# EAGLE board HDMI_RGB_LVDS (EAGLE 6.3)
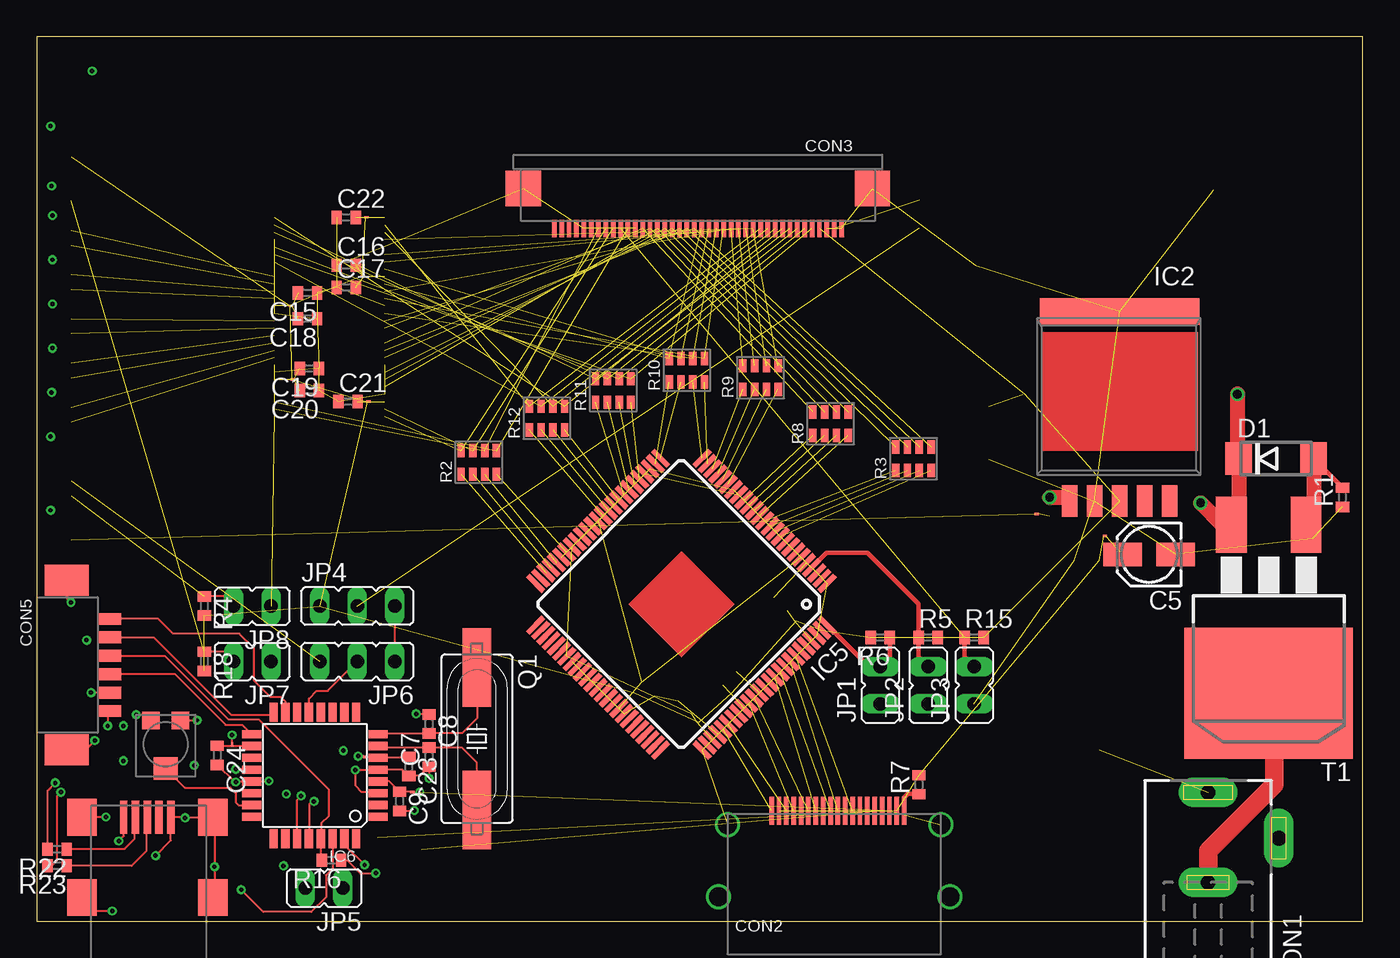
[diagram p0: board, top side]
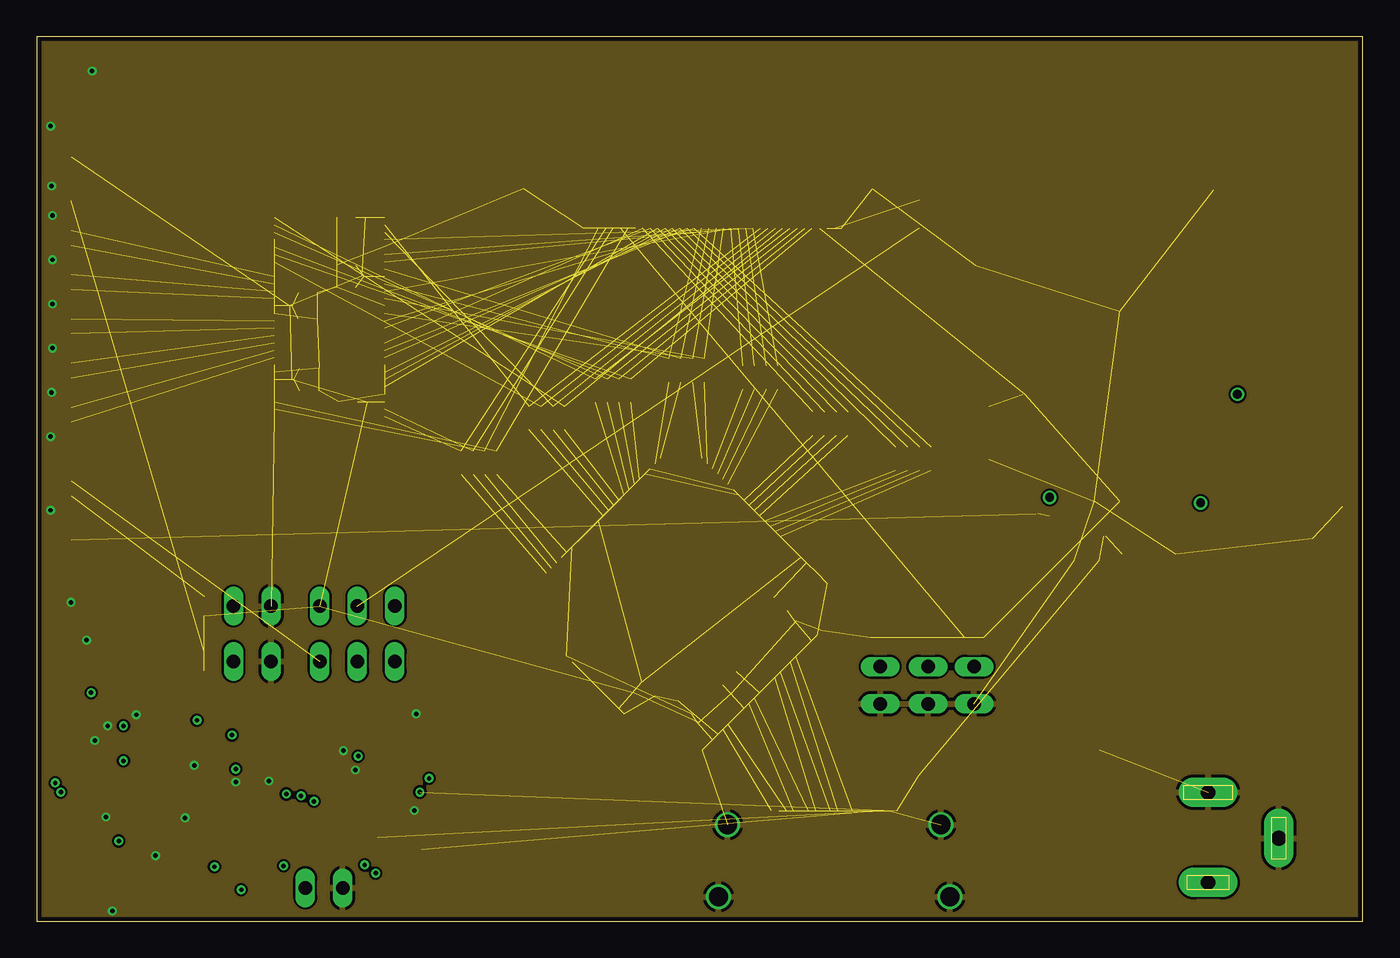
[diagram p1: board, inner layer Route2]
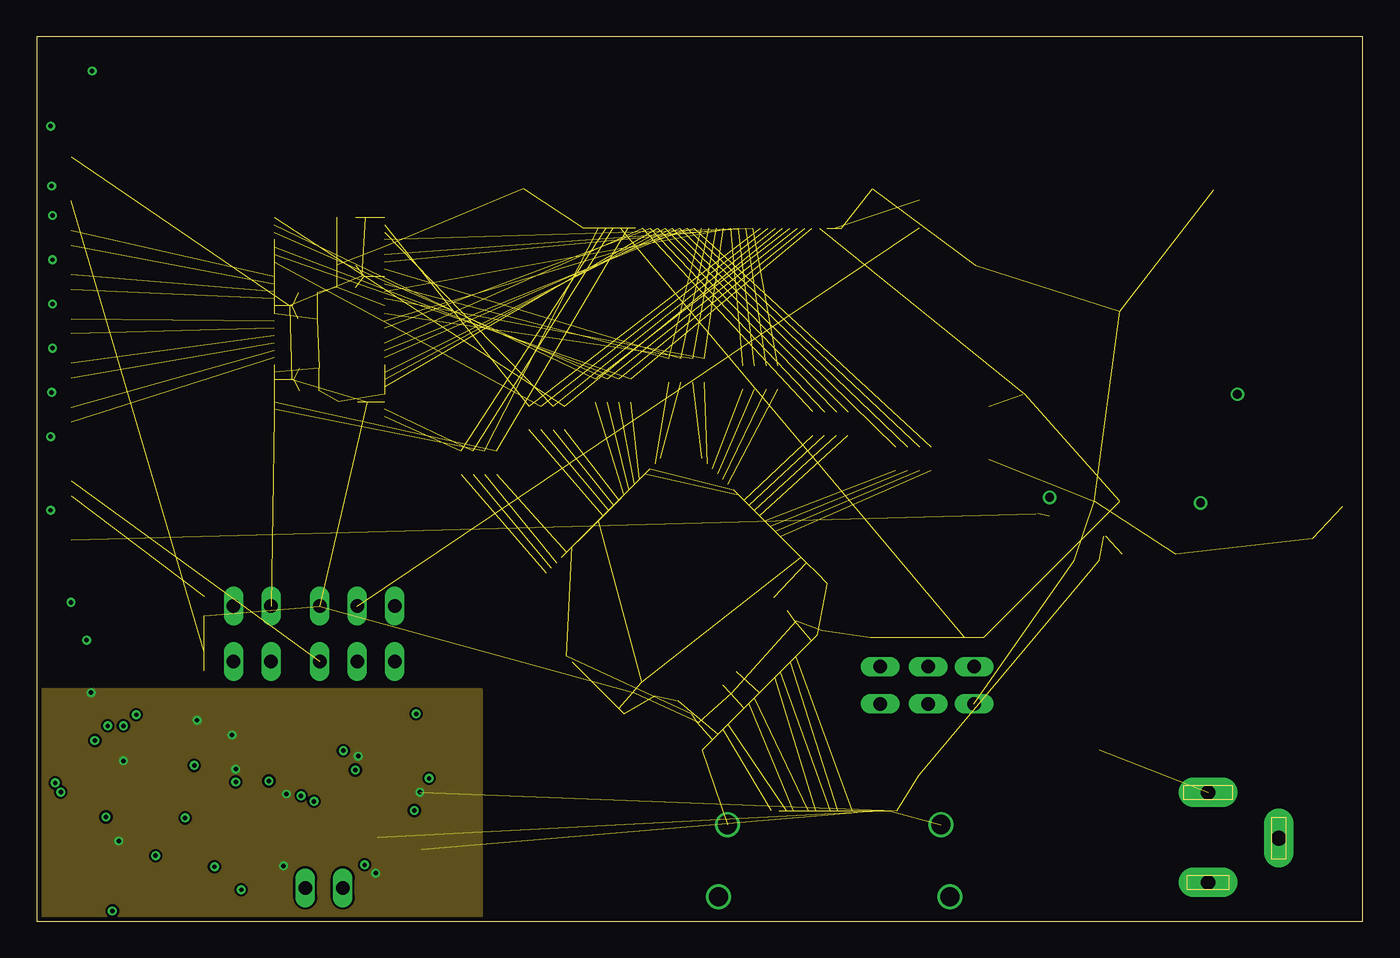
[diagram p2: board, inner layer Route15]
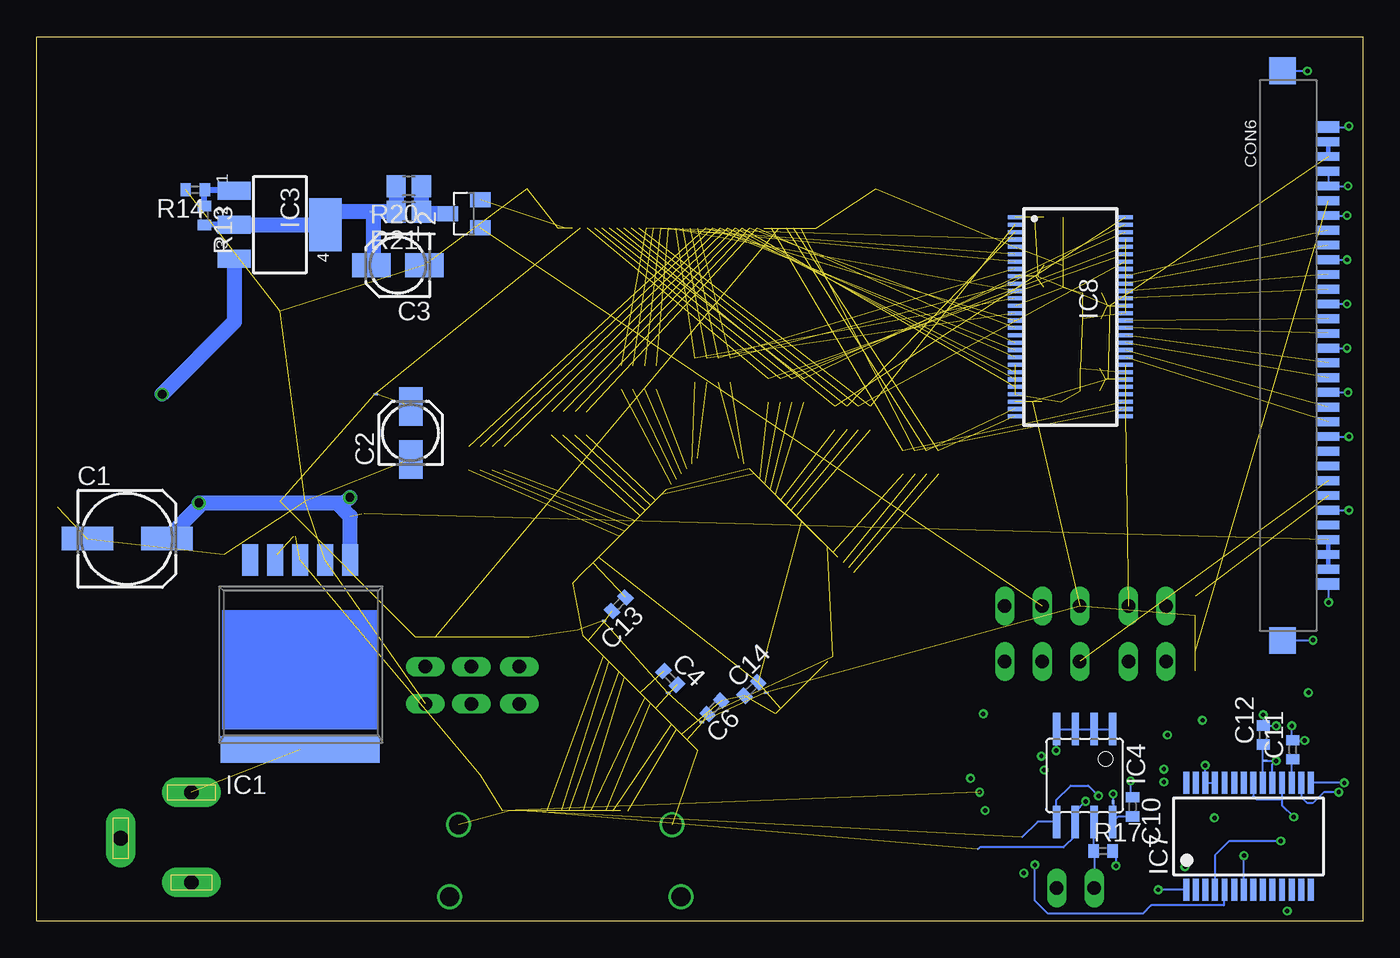
[diagram p3: board, bottom side, seen from below]

Size 90 x 60 mm. Coordinates in mm from the lower left corner, seen from the top.
Outline: 0,0 90,0 90,60 0,60 0,0
Copper layers (1+2*15+16): Top 0.035mm / dielectric 0.38mm / Route2 0.035mm / dielectric 0.71mm / Route15 0.035mm / dielectric 0.38mm / Bottom 0.035mm
Design rules "PCB-POOL Standard_ML4": minimum track width 0.15mm, minimum drill 0.3mm, track to track 0.15mm, track to pad 0.15mm, pad to pad 0.15mm, via to via 0.15mm, smd to smd 0.15mm, copper to edge 0.3mm, drill to drill 0.2mm, minimum pad ring 0.2mm, minimum via ring 0.15mm, stop-mask expansion 0.075mm, vias tented up to drill 0mil, thermal gap 0.2mm

## Footprints (pad centres in the part's own frame; a part is rotated, then mirrored left to right if it is on the bottom)
C_POL_6X6MM = smd 3.5 x 1.6: + 2.7,0.07; - -2.7,0.07
C_POL_4X4MM = smd 2.6 x 1.6: + 1.8,0; - -1.8,0
C0402 = smd 0.7 x 0.9: 1 -0.65,0; 2 0.65,0
KLDX-0202-A-LT = drill 1 pad 2 long: 1 3.1,-0.01; 2 0,-4.81; 3 -3,-0.01
FCI-10029449-111RLF = smd 0.3 x 1.9: 1 -4.25,1; 2 -3.75,1; 3 -3.25,1; 4 -2.75,1; 5 -2.25,1; 6 -1.75,1; 7 -1.25,1; 8 -0.75,1; 9 -0.25,1; 10 0.25,1; 11 0.75,1; 12 1.25,1; 13 1.75,1; 14 2.25,1; 15 2.75,1; 16 3.25,1; 17 3.75,1; 18 4.25,1; 19 4.75,1 | drill 1.3: GND@1 -7.25,0.05; GND@2 -7.85,-4.85; GND@3 7.25,0.05; GND@4 7.85,-4.85
XF2M-4015-1A = smd 0.3 x 1.2: 1 -9.75,2.5; 2 -9.25,2.5; 3 -8.75,2.5; 4 -8.25,2.5; 5 -7.75,2.5; 6 -7.25,2.5; 7 -6.75,2.5; 8 -6.25,2.5; 9 -5.75,2.5; 10 -5.25,2.5; 11 -4.75,2.5; 12 -4.25,2.5; 13 -3.75,2.5; 14 -3.25,2.5; 15 -2.75,2.5; 16 -2.25,2.5; 17 -1.75,2.5; 18 -1.25,2.5; 19 -0.75,2.5; 20 -0.25,2.5; 21 0.25,2.5; 22 0.75,2.5; 23 1.25,2.5; 24 1.75,2.5; 25 2.25,2.5; 26 2.75,2.5; 27 3.25,2.5; 28 3.75,2.5; 29 4.25,2.5; 30 4.75,2.5; 31 5.25,2.5; 32 5.75,2.5; 33 6.25,2.5; 34 6.75,2.5; 35 7.25,2.5; 36 7.75,2.5; 37 8.25,2.5; 38 8.75,2.5; 39 9.25,2.5; 40 9.75,2.5 | smd 2.4 x 2.4: GND@1 -11.85,-0.2; GND@2 11.85,-0.2
FCI-10033526-N3212LF = smd 0.5 x 2.25: 1 -1.6,0.8; 2 -0.8,0.8; 3 0,0.8; 4 0.8,0.8; 5 1.6,0.8 | smd 2 x 2.5: GND@1 -4.45,0.8; GND@2 -4.45,-4.65; GND@3 4.45,-4.65; GND@4 4.45,0.8
MOLEX-53261-0671 = smd 0.8 x 1.6: 1 -3.125,2.55; 2 -1.875,2.55; 3 -0.625,2.55; 4 0.625,2.55; 5 1.875,2.55; 6 3.125,2.55 | smd 2.1 x 3: GND@1 -5.75,-0.35; GND@2 5.75,-0.35
FI-X30SSLA-HF = smd 0.6 x 1.5: 1 -14.5,2.65; 2 -13.5,2.65; 3 -12.5,2.65; 4 -11.5,2.65; 5 -10.5,2.65; 6 -9.5,2.65; 7 -8.5,2.65; 8 -7.5,2.65; 9 -6.5,2.65; 10 -5.5,2.65; 11 -4.5,2.65; 12 -3.5,2.65; 13 -2.5,2.65; 14 -1.5,2.65; 15 -0.5,2.65; 16 0.5,2.65; 17 1.5,2.65; 18 2.5,2.65; 19 3.5,2.65; 20 4.5,2.65; 21 5.5,2.65; 22 6.5,2.65; 23 7.5,2.65; 24 8.5,2.65; 25 9.5,2.65; 26 10.5,2.65; 27 11.5,2.65; 28 12.5,2.65; 29 13.5,2.65; 30 14.5,2.65 | smd 0.8 x 1.5: GND@1 -15.5,2.65; GND@2 15.5,2.65 | smd 1.8 x 1.8: GND@3 -19.325,-0.45; GND@4 19.325,-0.45
DO214A = smd 1.8 x 2.2: A 2.55,0; C -2.55,0
TO263-5 = smd 1.07 x 2.16: 1 3.4,7; 2 1.7,7; 3 0,7; 4 -1.7,7; 5 -3.4,7 | smd 10.8 x 1.8: 6 0,-5.87
SOT223 = smd 1.219 x 2.235: 1 -2.311,-3.099; 2 0,-3.099; 3 2.311,-3.099 | smd 3.6 x 2.2: 4 0,3.099
SOIC8 = smd 0.5 x 2.2: 1 -1.905,-3.154; 2 -0.645,-3.154; 3 0.625,-3.154; 4 1.895,-3.154; 5 1.905,3.154; 6 0.635,3.154; 7 -0.635,3.154; 8 -1.905,3.154
HTQFP-100 = smd 1.5 x 0.35: 1 -8,6; 2 -8,5.5; 3 -8,5; 4 -8,4.5; 5 -8,4; 6 -8,3.5; 7 -8,3; 8 -8,2.5; 9 -8,2; 10 -8,1.5; 11 -8,1; 12 -8,0.5; 13 -8,0; 14 -8,-0.5; 15 -8,-1; 16 -8,-1.5; 17 -8,-2; 18 -8,-2.5; 19 -8,-3; 20 -8,-3.5; 21 -8,-4; 22 -8,-4.5; 23 -8,-5; 24 -8,-5.5; 25 -8,-6; 51 8,-6; 52 8,-5.5; 53 8,-5; 54 8,-4.5; 55 8,-4; 56 8,-3.5; 57 8,-3; 58 8,-2.5; 59 8,-2; 60 8,-1.5; 61 8,-1; 62 8,-0.5; 63 8,0; 64 8,0.5; 65 8,1; 66 8,1.5; 67 8,2; 68 8,2.5; 69 8,3; 70 8,3.5; 71 8,4; 72 8,4.5; 73 8,5; 74 8,5.5; 75 8,6 | smd 0.35 x 1.5: 26 -6,-8; 27 -5.5,-8; 28 -5,-8; 29 -4.5,-8; 30 -4,-8; 31 -3.5,-8; 32 -3,-8; 33 -2.5,-8; 34 -2,-8; 35 -1.5,-8; 36 -1,-8; 37 -0.5,-8; 38 0,-8; 39 0.5,-8; 40 1,-8; 41 1.5,-8; 42 2,-8; 43 2.5,-8; 44 3,-8; 45 3.5,-8; 46 4,-8; 47 4.5,-8; 48 5,-8; 49 5.5,-8; 50 6,-8; 76 6,8; 77 5.5,8; 78 5,8; 79 4.5,8; 80 4,8; 81 3.5,8; 82 3,8; 83 2.5,8; 84 2,8; 85 1.5,8; 86 1,8; 87 0.5,8; 88 0,8; 89 -0.5,8; 90 -1,8; 91 -1.5,8; 92 -2,8; 93 -2.5,8; 94 -3,8; 95 -3.5,8; 96 -4,8; 97 -4.5,8; 98 -5,8; 99 -5.5,8; 100 -6,8
TQFP32 = smd 1.27 x 0.559: 1 -4.293,2.8; 2 -4.293,2; 3 -4.293,1.2; 4 -4.293,0.4; 5 -4.293,-0.4; 6 -4.293,-1.2; 7 -4.293,-2; 8 -4.293,-2.8; 17 4.293,-2.8; 18 4.293,-2; 19 4.293,-1.2; 20 4.293,-0.4; 21 4.293,0.4; 22 4.293,1.2; 23 4.293,2; 24 4.293,2.8 | smd 0.559 x 1.27: 9 -2.8,-4.293; 10 -2,-4.293; 11 -1.2,-4.293; 12 -0.4,-4.293; 13 0.4,-4.293; 14 1.2,-4.293; 15 2,-4.293; 16 2.8,-4.293; 25 2.8,4.293; 26 2,4.293; 27 1.2,4.293; 28 0.4,4.293; 29 -0.4,4.293; 30 -1.2,4.293; 31 -2,4.293; 32 -2.8,4.293
SSOP28 = smd 0.4 x 1.5: 1 -4.225,-3.625; 2 -3.575,-3.625; 3 -2.925,-3.625; 4 -2.275,-3.625; 5 -1.625,-3.625; 6 -0.975,-3.625; 7 -0.325,-3.625; 8 0.325,-3.625; 9 0.975,-3.625; 10 1.625,-3.625; 11 2.275,-3.625; 12 2.925,-3.625; 13 3.575,-3.625; 14 4.225,-3.625; 15 4.225,3.625; 16 3.575,3.625; 17 2.925,3.625; 18 2.275,3.625; 19 1.625,3.625; 20 0.975,3.625; 21 0.325,3.625; 22 -0.325,3.625; 23 -0.975,3.625; 24 -1.625,3.625; 25 -2.275,3.625; 26 -2.925,3.625; 27 -3.575,3.625; 28 -4.225,3.625
TSSOP-56 = smd 0.28 x 1: 1 -6.75,-3.85; 2 -6.25,-3.85; 3 -5.75,-3.85; 4 -5.25,-3.85; 5 -4.75,-3.85; 6 -4.25,-3.85; 7 -3.75,-3.85; 8 -3.25,-3.85; 9 -2.75,-3.85; 10 -2.25,-3.85; 11 -1.75,-3.85; 12 -1.25,-3.85; 13 -0.75,-3.85; 14 -0.25,-3.85; 15 0.25,-3.85; 16 0.75,-3.85; 17 1.25,-3.85; 18 1.75,-3.85; 19 2.25,-3.85; 20 2.75,-3.85; 21 3.25,-3.85; 22 3.75,-3.85; 23 4.25,-3.85; 24 4.75,-3.85; 25 5.25,-3.85; 26 5.75,-3.85; 27 6.25,-3.85; 28 6.75,-3.85; 29 6.75,3.65; 30 6.25,3.65; 31 5.75,3.65; 32 5.25,3.65; 33 4.75,3.65; 34 4.25,3.65; 35 3.75,3.65; 36 3.25,3.65; 37 2.75,3.65; 38 2.25,3.65; 39 1.75,3.65; 40 1.25,3.65; 41 0.75,3.65; 42 0.25,3.65; 43 -0.25,3.65; 44 -0.75,3.65; 45 -1.25,3.65; 46 -1.75,3.65; 47 -2.25,3.65; 48 -2.75,3.65; 49 -3.25,3.65; 50 -3.75,3.65; 51 -4.25,3.65; 52 -4.75,3.65; 53 -5.25,3.65; 54 -5.75,3.65; 55 -6.25,3.65; 56 -6.75,3.65
JUMPER2_THROUGHHOLE = drill 0.914 long: 1 0,-1.27; 2 0,1.27
JUMPER3_THROUGHHOLE = drill 0.914 long: 1 0,-2.54; 2 0,0; 3 0,2.54
HC49/USSM = smd 5.334 x 1.93: 1 -4.826,0; 2 4.826,0
R0402 = smd 0.7 x 0.9: 1 -0.65,0; 2 0.65,0
R-ARRAY-4X0603 = smd 0.9 x 0.5: 1M -0.8,1.2; 1P 0.8,1.2; 2M -0.8,0.4; 2P 0.8,0.4; 3M -0.8,-0.4; 3P 0.8,-0.4; 4M -0.8,-1.2; 4P 0.8,-1.2
35WR5KLFTR = smd 1.2 x 1.2: 1 -1.6,1; 3 -1.6,-1 | smd 1.5 x 1.6: 2 1.65,0
R2512 = smd 1.3 x 1.5: 1 -0.85,0; 2 0.85,0
SP2 = smd 0.15 x 0.15: P$1 0.075,0; P$2 -0.075,0
D2PAK = smd 2.083 x 3.81: 1 -2.54,-8.89; 3 2.54,-8.89 | smd 11.43 x 8.89: 2 0,2.54
SOT23 = smd 1 x 1.4: 1 -0.95,-1.1; 2 0.95,-1.1; 3 0,1.1

## Placement (x,y rotation side)
C1  100u  [C_POL_6X6MM]  83.88,25.88 0 bottom
C2  10u  [C_POL_4X4MM]  64.62,33.12 90 bottom
C3  10u  [C_POL_4X4MM]  65.5,44.5 180 bottom
C4  100n  [C0402]  47,16.5 315 bottom
C5  10u  [C_POL_4X4MM]  75.5,24.88 180 top
C6  100n  [C0402]  44,14.5 225 bottom
C7  10p  [C0402]  26.62,11.12 90 top
C8  10p  [C0402]  26.62,13.38 270 top
C9  100n  [C0402]  24.62,8.12 270 top
C10  100n  [C0402]  15.62,7.75 270 bottom
C11  100n  [C0402]  4.75,11.62 90 bottom
C12  100n  [C0402]  6.75,12.62 90 bottom
C13  100n  [C0402]  50.5,21.5 225 bottom
C14  100n  [C0402]  41.5,15.75 45 bottom
C15  0.01u  [C0402]  18.38,42.62 180 top
C16  0.1u  [C0402]  21,44.5 0 top
C17  0.01u  [C0402]  21,43 0 top
C18  0.1u  [C0402]  18.38,40.88 180 top
C19  0.01u  [C0402]  18.5,37.5 180 top
C20  0.1u  [C0402]  18.5,36 180 top
C21  0.01u  [C0402]  21.12,35.25 0 top
C22  0.01u  [C0402]  21,47.75 0 top
C23  100n  [C0402]  25.25,10.5 270 top
C24  100n  [C0402]  12.25,11.25 270 top
CON1  KLDX-0202-A-LT  [KLDX-0202-A-LT]  79.5,5.62 90 top
CON2  FCI-10029449-111RLF  [FCI-10029449-111RLF]  54.12,6.5 0 top
CON3  XF2M-4015-1A  [XF2M-4015-1A]  44.88,49.5 180 top
CON4  FCI-10033526-N3212LF  [FCI-10033526-N3212LF]  7.5,6.25 0 top
CON5  MOLEX-53261-0671  [MOLEX-53261-0671]  2.38,17.38 270 top
CON6  FI-X30SSLA-HF  [FI-X30SSLA-HF]  5,38.38 270 bottom
D1  BZG03C15TR3  [DO214A]  84.12,31.38 0 top
IC1  WPMDL1300501BD  [TO263-5]  72.12,17.5 0 bottom
IC2  WPMDL1300331BD  [TO263-5]  73.5,35.5 180 top
IC3  TLV1117CDCYR  [SOT223]  73.5,47.25 270 bottom
IC4  AT24C01C-SSHM-B  [SOIC8]  18.88,9.88 180 bottom
IC5  TFP401APZP  [HTQFP-100]  43.75,21.5 225 top
IC6  ATMEGA48A-AU  [TQFP32]  18.88,9.88 180 top
IC7  FT232RL  [SSOP28]  7.75,5.75 0 bottom
IC8  SN75LVDS83BDGGR  [TSSOP-56]  19.75,41 270 bottom
JP1  JUMPER2  [JUMPER2_THROUGHHOLE]  57.25,16 0 top
JP2  JUMPER2  [JUMPER2_THROUGHHOLE]  60.5,16 0 top
JP3  JUMPER2  [JUMPER2_THROUGHHOLE]  63.62,16 0 top
JP4  JUMPER3  [JUMPER3_THROUGHHOLE]  21.75,21.38 270 top
JP5  [JUMPER2_THROUGHHOLE]  19.5,2.25 90 top
JP6  JUMPER3  [JUMPER3_THROUGHHOLE]  21.75,17.62 90 top
JP7  [JUMPER2_THROUGHHOLE]  14.62,17.62 90 top
JP8  [JUMPER2_THROUGHHOLE]  14.62,21.38 90 top
Q1  ATS073ASM-1  [HC49/USSM]  29.88,12.38 270 top
R1  100k  [R0402]  88.62,28.75 90 top
R2  22R  [R-ARRAY-4X0603]  30,31.12 90 top
R3  22R  [R-ARRAY-4X0603]  59.5,31.38 90 top
R4  10k  [R0402]  11.38,21.38 270 top
R5  10k  [R0402]  60.5,19.25 0 top
R6  10k  [R0402]  57.25,19.25 180 top
R7  100R  [R0402]  59.88,9.25 90 top
R8  22R  [R-ARRAY-4X0603]  53.88,33.75 90 top
R9  22R  [R-ARRAY-4X0603]  49.12,36.88 90 top
R10  22R  [R-ARRAY-4X0603]  44.12,37.38 90 top
R11  22R  [R-ARRAY-4X0603]  39.12,36 90 top
R12  22R  [R-ARRAY-4X0603]  34.62,34.12 90 top
R13  4k7  [R0402]  78.62,47.88 270 bottom
R14  31k4  [R0402]  79.25,49.62 180 bottom
R15  10k  [R0402]  63.62,19.25 0 top
R16  10k  [R0402]  20,4.12 180 top
R17  10k  [R0402]  17.62,4.75 0 bottom
R18  10k  [R0402]  11.38,17.62 270 top
R19  10k  [35WR5KLFTR]  8.75,12 270 top
R20  140R  [R2512]  64.75,49.88 180 bottom
R21  140R  [R2512]  64.75,48.12 180 bottom
R22  0R  [R0402]  1.38,4.88 180 top
R23  0R  [R0402]  1.38,3.75 180 top
SP1  SP2  [SP2]  67.88,27.62 0 top
SP2  SP2  [SP2]  51.5,20.38 0 bottom
SP3  SP2  [SP2]  40.5,15.5 0 bottom
SP4  SP2  [SP2]  44.88,13.5 0 bottom
SP5  SP2  [SP2]  47.12,15.5 0 bottom
SP9  SP2  [SP2]  6.62,10.88 180 bottom
SP10  SP2  [SP2]  16.94,8.06 90 bottom
SP11  SP2  [SP2]  25.5,8.75 0 top
SP12  SP2  [SP2]  22.31,11.12 180 top
SP13  SP2  [SP2]  13.25,12 90 top
SP14  SP2  [SP2]  22.12,43.75 0 top
SP15  SP2  [SP2]  22.38,47.75 0 top
SP16  SP2  [SP2]  22.5,35.25 0 top
SP17  SP2  [SP2]  17.25,41.75 0 top
SP18  SP2  [SP2]  17.38,36.75 0 top
T1  IRF9530NSTRRPBF  [D2PAK]  83.62,18 180 top
T2  IRLML2502TRPBF  [SOT23]  61,48 90 bottom
U$1  FRAME_A3_LANDSCAPE  [FRAME]  12.73,-0.62 0 top
U$2  FRAME_A3_LANDSCAPE  [FRAME]  0,0 0 top
U$3  FRAME_A3_LANDSCAPE  [FRAME]  0,0 0 top
U$4  FRAME_A3_LANDSCAPE  [FRAME]  0,0 0 top
U$5  FRAME_A3_LANDSCAPE  [FRAME]  0,0 0 top
U$15  FRAME_A3_LANDSCAPE  [FRAME]  0,0 0 top
U$95  SP2  [SP2]  72.5,26.12 0 top
U$96  SP2  [SP2]  67,35.75 0 bottom
U$97  SP2  [SP2]  67.25,48.12 0 bottom

## Library data of the parts
C1-C24 CON1-CON6 D1 IC1-IC8 JP1-JP8 Q1 R1-R23 SP1-SP5 SP9-SP18 T1 T2 U$1-U$5 U$15 U$95-U$97 = SchlegelAr_Master

## Nets
+3V3: CON3.4 CON6.1 CON6.2 IC2.3 IC5.99 JP4.1 R4.2 R5.2 R6.2 R15.2 R18.2 SP2.P$2 SP3.P$2 SP4.P$2 SP5.P$2 SP14.P$2 SP15.P$2 SP16.P$2 SP17.P$2 SP18.P$2 U$96.P$2
+5V: CON2.18 CON4.1 CON5.5 IC1.3 IC6.20 IC7.4 IC7.19 R7.2 R16.1 R17.2 R19.1 SP9.P$2 SP10.P$1 SP11.P$1 SP12.P$1 SP13.P$1 U$95.P$2
+9V6: IC3.2 IC3.4 R13.2 R20.2 R21.2 U$97.P$2
+12V: CON6.28 CON6.29 CON6.30 SP1.P$2
AVR_!RESET: CON5.3 IC6.29 R16.2
AVR_MISO: CON5.2 IC6.16
AVR_MOSI: CON5.1 IC6.15
AVR_PWM: IC6.13 JP6.2
AVR_PWM_ADC: IC6.23 R19.2
AVR_SCK: CON5.4 IC6.17
AVR_XTAL1: C7.2 IC6.7 Q1.2
AVR_XTAL2: C8.2 IC6.8 Q1.1
EDID_SCL: CON2.15 IC4.6 IC6.28
EDID_SDA: CON2.16 IC4.5 IC6.27
EDID_WP: IC4.7 JP5.2 R17.1
FTDI_3V3OUT: C11.1 IC7.17
FTDI_RXD: IC6.31 IC7.5
FTDI_TXD: IC6.30 IC7.1
GND: C1.- C2.- C3.- C4.1 C5.- C6.1 C7.1 C8.1 C9.2 C10.1 C11.2 C12.2 C13.1 C14.1 C15.1 C16.1 C17.1 C18.1 C19.1 C20.1 C21.1 C22.1 C23.2 C24.2 CON1.1 CON1.2 CON2.2 CON2.5 CON2.8 CON2.11 CON2.17 CON2.GND@1 CON2.GND@2 CON2.GND@3 CON2.GND@4 CON3.1 CON3.3 CON3.29 CON3.36 CON3.GND@1 CON3.GND@2 CON4.5 CON4.GND@1 CON4.GND@2 CON4.GND@3 CON4.GND@4 CON5.6 CON5.GND@1 CON5.GND@2 CON6.3 CON6.4 CON6.6 CON6.9 CON6.12 CON6.15 CON6.18 CON6.21 CON6.26 CON6.GND@1 CON6.GND@2 CON6.GND@3 CON6.GND@4 IC1.2 IC1.6 IC2.2 IC2.6 IC4.1 IC4.2 IC4.3 IC4.4 IC5.1 IC5.3 IC5.5 IC5.7 IC5.19 IC5.28 IC5.39 IC5.45 IC5.58 IC5.68 IC5.76 IC5.79 IC5.83 IC5.87 IC5.89 IC5.92 IC5.98 IC6.3 IC6.5 IC6.21 IC7.7 IC7.18 IC7.21 IC7.25 IC7.26 IC8.5 IC8.13 IC8.21 IC8.25 IC8.29 IC8.33 IC8.35 IC8.36 IC8.43 IC8.49 IC8.53 JP1.1 JP2.1 JP3.1 JP5.1 JP7.1 JP8.1 R1.1 R14.2 R19.3
HDMI_CLK+: CON2.10 IC5.93
HDMI_CLK-: CON2.12 IC5.94
HDMI_DAT0+: CON2.7 IC5.90
HDMI_DAT0-: CON2.9 IC5.91
HDMI_DAT1+: CON2.4 IC5.85
HDMI_DAT1-: CON2.6 IC5.86
HDMI_DAT2+: CON2.1 IC5.80
HDMI_DAT2-: CON2.3 IC5.81
HDMI_OCK_INV: IC5.100 JP1.2 R6.1
HDMI_PIXS: IC5.4 JP2.2 R5.1
LVDS_0+: CON6.8 IC8.47
LVDS_0-: CON6.7 IC8.48
LVDS_1+: CON6.11 IC8.45
LVDS_1-: CON6.10 IC8.46
LVDS_2+: CON6.14 IC8.41
LVDS_2-: CON6.13 IC8.42
LVDS_3+: CON6.20 IC8.37
LVDS_3-: CON6.19 IC8.38
LVDS_CLK+: CON6.17 IC8.39
LVDS_CLK-: CON6.16 IC8.40
LVDS_LED_EN: CON6.25 JP8.2 R4.1
LVDS_PWM: CON6.24 JP6.3
LVDS_REVSCAN: CON6.5 JP7.2 R18.1
N$1: IC5.48 R2.1M
N$2: CON1.3 T1.2
N$4: D1.A R1.2 T1.1
N$5: IC7.15 R22.2
N$6: IC5.47 R2.2M
N$7: IC5.46 R2.3M
N$8: IC5.44 R2.4M
N$9: IC5.13 R3.1M
N$10: IC7.16 R23.2
N$11: IC5.12 R3.2M
N$12: IC5.11 R3.3M
N$13: IC5.10 R3.4M
N$14: IC5.17 R8.1M
N$15: IC5.16 R8.2M
N$16: IC5.15 R8.3M
N$17: IC5.14 R8.4M
N$18: CON2.19 R7.1
N$19: IC5.23 R9.1M
N$20: IC5.22 R9.2M
N$21: IC5.21 R9.3M
N$22: IC5.20 R9.4M
N$23: IC5.27 R10.1M
N$24: IC5.26 R10.2M
N$25: IC5.25 R10.3M
N$26: IC5.24 R10.4M
N$27: IC5.33 R11.1M
N$28: IC5.32 R11.2M
N$29: IC5.31 R11.3M
N$30: IC5.30 R11.4M
N$31: IC5.37 R12.1M
N$32: IC5.36 R12.2M
N$33: IC5.35 R12.3M
N$34: IC5.34 R12.4M
N$35: IC3.1 R13.1 R14.1
N$37: CON3.2 T2.2
N$39: C22.2 IC8.1 SP15.P$1
N$41: C21.2 IC8.26 SP16.P$1
N$42: C15.2 C18.2 IC8.44 SP17.P$1
N$43: C19.2 C20.2 IC8.34 SP18.P$1
N$44: C12.1 IC7.20 SP9.P$1
N$45: C24.1 IC6.18 SP13.P$2
N$46: C9.1 IC6.4 SP11.P$2
N$47: C23.1 IC6.6 SP12.P$2
N$48: C16.2 C17.2 IC8.9 SP14.P$1
N$49: C10.2 IC4.8 SP10.P$2
N$50: C6.2 IC5.18 IC5.29 IC5.43 IC5.57 IC5.78 SP4.P$1
N$51: C2.+ U$96.P$1
N$52: C4.2 IC5.82 IC5.84 IC5.88 IC5.95 SP5.P$1
N$53: C13.2 IC5.97 SP2.P$1
N$54: C14.2 IC5.6 IC5.38 IC5.67 SP3.P$1
N$55: C3.+ U$97.P$1
N$56: C5.+ U$95.P$1
N$57: R20.1 R21.1 T2.3
N$59: C1.+ D1.C IC1.1 IC2.1 IC3.3 SP1.P$1 T1.3
RGB_DE: CON3.34 IC8.30 R2.3P
RGB_DISP: CON3.31 JP3.2 R15.1
RGB_EVEN_B0: CON3.21 IC8.15 R3.4P
RGB_EVEN_B1: CON3.22 IC8.19 R3.3P
RGB_EVEN_B2: CON3.23 IC8.20 R3.2P
RGB_EVEN_B3: CON3.24 IC8.22 R3.1P
RGB_EVEN_B4: CON3.25 IC8.23 R8.4P
RGB_EVEN_B5: CON3.26 IC8.24 R8.3P
RGB_EVEN_B6: CON3.27 IC8.16 R8.2P
RGB_EVEN_B7: CON3.28 IC8.18 R8.1P
RGB_EVEN_G0: CON3.13 IC8.4 R9.4P
RGB_EVEN_G1: CON3.14 IC8.6 R9.3P
RGB_EVEN_G2: CON3.15 IC8.7 R9.2P
RGB_EVEN_G3: CON3.16 IC8.11 R9.1P
RGB_EVEN_G4: CON3.17 IC8.12 R10.4P
RGB_EVEN_G5: CON3.18 IC8.14 R10.3P
RGB_EVEN_G6: CON3.19 IC8.8 R10.2P
RGB_EVEN_G7: CON3.20 IC8.10 R10.1P
RGB_EVEN_R0: CON3.5 IC8.51 R11.4P
RGB_EVEN_R1: CON3.6 IC8.52 R11.3P
RGB_EVEN_R2: CON3.7 IC8.54 R11.2P
RGB_EVEN_R3: CON3.8 IC8.55 R11.1P
RGB_EVEN_R4: CON3.9 IC8.56 R12.4P
RGB_EVEN_R5: CON3.10 IC8.3 R12.3P
RGB_EVEN_R6: CON3.11 IC8.50 R12.2P
RGB_EVEN_R7: CON3.12 IC8.2 R12.1P
RGB_HSYNC: CON3.32 IC8.27 R2.2P
RGB_ODCK: CON3.30 IC8.31 R2.4P
RGB_PWM: JP4.3 JP6.1
RGB_PWM_EN: JP4.2 T2.1
RGB_VSYNC: CON3.33 IC8.28 R2.1P
USB_D+: CON4.3 R23.1
USB_D-: CON4.2 R22.1

## Tracks (layer width: path | path; a pad name or v marks a point on that pad's centre or on a via)
+3V3  (19 unrouted)
  Bottom 0.3: CON6.1 CON6.2
+5V  (via drill 0.3)  (4 unrouted)
  Top 0.15: SP12.P$1 22.18,11.19 v21.81,11.19 | R19.1 9.78,13.62 v10.88,13.62 | IC6.20 14.54,10.31 v13.5,10.31 | v5.56,5.44 5.9,5.78 CON4.1 | CON5.5 v3.69,15.5 | R16.1 21.06,4.12 21.94,3.25 v23,3.25 | SP13.P$1 v13.25,12.62 | SP11.P$1 v26,8.75
  Bottom 0.15: R17.2 16.75,4.53 v16.75,3.75 | IC7.4 10,2.15 10,4.5 9.06,5.44 v5.56,5.44 | IC7.19 6.12,10.62 v5.88,10.88 SP9.P$2 | SP10.P$1 v16.94,8.62
  pour Route15: 0,0 0,15.75 30.19,15.75 30.19,0
+9V6
  Bottom 0.406: IC3.2 78.6,47.25 R13.2
  Bottom 1.016: IC3.2 IC3.4 69.53,48.12 U$97.P$2 R21.2 R20.2
+12V  (1 unrouted)
  Bottom 0.3: CON6.30 CON6.29 CON6.28
AVR_!RESET
  Top 0.15: R16.2 19.27,4.2 IC6.29 19.31,5.62 19.31,6.62 19.81,7.12 19.81,8.94 15.06,13.69 13,13.69 8.69,18 CON5.3
AVR_MISO
  Top 0.15: CON5.2 7.94,19.25 13.19,14 15.91,14 IC6.16
AVR_MOSI
  Top 0.15: IC6.15 16.88,14.88 16.56,15.19 15.88,15.19 14.75,16.31 14.75,18.5 13.75,19.5 9.25,19.5 8.25,20.5 CON5.1
AVR_PWM
  Top 0.15: IC6.13 18.48,15.1 19,15.62 19.75,15.62 JP6.2
AVR_PWM_ADC
  Top 0.15: R19.2 10.04,9.06 13.12,9.06 13.5,8.69 13.5,8.06 13.69,7.88 IC6.23
AVR_SCK
  Top 0.15: IC6.17 13.94,13.31 12.81,13.31 9.38,16.75 CON5.4
AVR_XTAL1
  Top 0.15: IC6.7 23.27,11.78 C7.2 26.65,11.75 28.88,11.75 29.88,10.75 Q1.2
AVR_XTAL2
  Top 0.15: IC6.8 23.22,12.72 C8.2 26.65,12.75 28.88,12.75 29.88,13.75 Q1.1
EDID_SCL  (via drill 0.3)  (1 unrouted)
  Top 0.15: v18.81,8.12 18.69,8.12 18.5,7.94 18.5,5.61 IC6.28
  Bottom 0.15: v18.81,8.12 19.51,7.43 IC4.6 19.51,5.8 20.31,5 26,5 26.12,4.88
EDID_SDA  (via drill 0.3)  (1 unrouted)
  Top 0.15: IC6.27 17.68,8.24 v17.94,8.5
  Bottom 0.15: 20.81,6.75 20.81,8.19 19.81,9.19 18.62,9.19 v17.94,8.5 | 20.81,6.75 IC4.5 | 20.81,6.75 22.06,6.75 23.12,5.69
EDID_WP
  Bottom 0.15: IC4.7 18.24,4.79 R17.1 18.23,4.71 JP5.2
FTDI_3V3OUT
  Bottom 0.15: IC7.17 4.83,10.9 C11.1
FTDI_RXD  (via drill 0.3)
  Top 0.15: v22.25,3.81 20.88,5.19 IC6.31
  Bottom 0.15: IC7.5 9.44,2.06 9.44,1.06 14.38,1.06 14.94,0.5 21.38,0.5 22.25,1.38 v22.25,3.81
FTDI_TXD  (via drill 0.3)
  Top 0.15: IC6.30 20.07,3.58 19.62,3.12 19.62,1.62 18.62,0.62 15.38,0.62 v13.88,2.12
  Bottom 0.15: IC7.1 v13.88,2.12
GND  (via drill 0.3)  (61 unrouted)
  Top 0.15: v15.75,9.5 14.61,9.5 IC6.21 14.54,9.44 v13.5,9.44 13.41,9.44 C24.2 | IC6.3 23.09,8.75 22.06,8.75 21.62,9.19 v21.62,10.25 23.14,10.25 IC6.5 24.82,10.28 C23.2 26,9.85 C7.1 26.62,9.69 | C9.2 24.65,7.5 v25.62,7.5 | CON5.6 4.81,14.14 v4.81,13.25 | R19.3 7.35,14 v6.75,14 | v3.94,12.25 3.31,11.62 CON5.GND@2 | CON4.GND@4 11.9,7 | 11.9,7 v10.06,7 10.01,7.05 CON4.5 9.1,5.47 v8.06,4.44 | CON4.GND@2 3.96,0.69 v5.12,0.69 | CON4.GND@3 12.06,1.71 12.06,6.84 11.9,7 | CON4.GND@1 3.06,7.06 v4.69,7.06 | CON5.GND@1 2.02,21.91 v2.31,21.62 | C8.1 25.79,14.03 v25.75,14.06
  Bottom 0.15: v20.81,11.56 20.81,12.99 IC4.4 IC4.3 IC4.2 IC4.1 | C10.1 15.75,8.53 v15.75,9.5 | v4.81,13.25 4.81,12.34 C11.2 4.72,12.25 v3.94,12.25 | 5.88,13.25 6.72,13.25 C12.2 v6.75,14 | IC7.25 IC7.26 v10.69,10.56 | IC7.7 8.06,2.14 v8.06,4.44 | IC7.18 5.47,8.38 | 5.47,8.38 5.47,7.85 v4.69,7.06 | IC7.21 7.42,8.49 7.19,8.25 5.6,8.25 5.47,8.38 | CON6.GND@4 v3.39,19.05 v3.38,19.06 | CON6.GND@2 2.35,21.66 v2.31,21.62 | CON6.26 v0.94,27.88 | CON6.21 v0.94,32.88 | CON6.18 v1,35.88 | CON6.15 v1.06,38.88 | CON6.12 v1.06,41.88 | CON6.9 v1.06,44.88 | CON6.6 v1.06,47.88 | v1,49.88 CON6.4 CON6.3 | CON6.GND@1 1,53.88 v0.94,53.94 | CON6.GND@3 3.76,57.7 v3.75,57.69
  pour Route2: 0,60 90,60 90,0 0,0
HDMI_CLK+  (1 unrouted)
HDMI_CLK-  (1 unrouted)
HDMI_DAT0+  (1 unrouted)
HDMI_DAT0-  (1 unrouted)
HDMI_DAT1+  (1 unrouted)
HDMI_DAT1-  (1 unrouted)
HDMI_DAT2+  (1 unrouted)
HDMI_DAT2-  (1 unrouted)
HDMI_OCK_INV
  Top 0.305: IC5.100 53.66,20.09 56.5,17.25 57.23,17.25 JP1.2 57.9,17.92 R6.1
HDMI_PIXS
  Top 0.305: IC5.4 53.61,25 56.38,25 59.85,21.52 R5.1 59.85,17.92 JP2.2
LVDS_0+  (1 unrouted)
LVDS_0-  (1 unrouted)
LVDS_1+  (1 unrouted)
LVDS_1-  (1 unrouted)
LVDS_2+  (1 unrouted)
LVDS_2-  (1 unrouted)
LVDS_3+  (1 unrouted)
LVDS_3-  (1 unrouted)
LVDS_CLK+  (1 unrouted)
LVDS_CLK-  (1 unrouted)
LVDS_LED_EN  (1 unrouted)
  Top 0.15: JP8.2 12.71,22.02 R4.1
LVDS_PWM  (1 unrouted)
LVDS_REVSCAN  (1 unrouted)
  Top 0.15: JP7.2 12.71,18.27 R18.1
N$1  (1 unrouted)
N$2
  Top 1.27: CON1.3 79.51,4.76 84,9.25 84,15.09 T1.2
N$3  (via drill 0.3)
  other vias: 26.62,9.69
N$4
  Top 0.305: R1.2 88.62,29.43 D1.A
  Top 1.016: D1.A 86.67,27.4 T1.1
N$5  (via drill 0.3)
  Top 0.15: R22.2 0.72,8.85 v1.25,9.38
  Bottom 0.15: v1.25,9.38 IC7.15
N$6  (1 unrouted)
N$7  (1 unrouted)
N$8  (1 unrouted)
N$9  (1 unrouted)
N$10  (via drill 0.3)
  Top 0.15: R23.2 1,3.75 1.38,4.12 1.38,8.5 v1.62,8.75
  Bottom 0.15: v1.62,8.75 2.62,8.75 3.38,8 3.75,8 4.12,8.38 4.12,9.32 IC7.16
N$11  (1 unrouted)
N$12  (1 unrouted)
N$13  (1 unrouted)
N$14  (1 unrouted)
N$15  (1 unrouted)
N$16  (1 unrouted)
N$17  (1 unrouted)
N$18
  Top 0.305: CON2.19 58.88,8.38 59.12,8.62 59.85,8.62 R7.1
N$19  (1 unrouted)
N$20  (1 unrouted)
N$21  (1 unrouted)
N$22  (1 unrouted)
N$23  (1 unrouted)
N$24  (1 unrouted)
N$25  (1 unrouted)
N$26  (1 unrouted)
N$27  (1 unrouted)
N$28  (1 unrouted)
N$29  (1 unrouted)
N$30  (1 unrouted)
N$31  (1 unrouted)
N$32  (1 unrouted)
N$33  (1 unrouted)
N$34  (1 unrouted)
N$35
  Bottom 0.406: R13.1 78.62,49.6 R14.1 76.66,49.62 IC3.1
N$37  (1 unrouted)
N$39  (2 unrouted)
N$40  (via drill 0.3)
  other vias: 5.88,13.25
N$41  (2 unrouted)
N$42  (3 unrouted)
N$43  (3 unrouted)
N$44
  Bottom 0.15: IC7.20 6.78,10.88 | 6.78,10.88 6.78,11.95 C12.1 | SP9.P$1 6.78,10.88
N$45
  Top 0.15: IC6.18 13.25,11.88 | 13.25,11.88 12.28,11.88 C24.1 | SP13.P$2 13.25,11.88
N$46
  Top 0.15: 23.19,9.5 IC6.4 23.93,9.47 C9.1 25.4,8.78 SP11.P$2
N$47
  Top 0.15: 23.22,11.12 IC6.6 | 23.27,11.18 IC6.6 | 25.23,11.18 C23.1 25.2,11.2 25.07,11.07 IC6.6 | IC6.6 23.12,11.12 SP12.P$2
N$48  (3 unrouted)
N$49
  Bottom 0.15: C10.2 16.59,7.1 IC4.8 16.97,7.47 16.94,7.5 SP10.P$2
N$50  (6 unrouted)
N$51  (1 unrouted)
N$52  (5 unrouted)
N$53  (2 unrouted)
N$54  (4 unrouted)
N$55
  Bottom 1.016: U$97.P$1 67.17,44.62 C3.+
N$56  (1 unrouted)
N$57
  Bottom 1.016: R20.1 R21.1 63.77,48 T2.3
N$59  (via drill 0.6)  (1 unrouted)
  Top 1.016: v81.5,35.75 81.5,31.45 D1.C 81.58,27.38 T1.3 80.48,26.89 v79,28.38 | v68.75,28.75 69.85,28.75 IC2.1
  Bottom 1.016: IC3.3 76.6,40.65 v81.5,35.75 | C1.+ 79,28.12 v79,28.38 69.62,28.38 | IC1.1 68.72,27.48 69.62,28.38 | 69.62,28.38 69.12,28.38 v68.75,28.75
N$62  (via drill 0.3)
  other vias: 12.06,3.69
RGB_DE  (2 unrouted)
RGB_DISP  (1 unrouted)
  Top 0.305: R15.1 62.98,17.92 JP3.2
RGB_EVEN_B0  (2 unrouted)
RGB_EVEN_B1  (2 unrouted)
RGB_EVEN_B2  (2 unrouted)
RGB_EVEN_B3  (2 unrouted)
RGB_EVEN_B4  (2 unrouted)
RGB_EVEN_B5  (2 unrouted)
RGB_EVEN_B6  (2 unrouted)
RGB_EVEN_B7  (2 unrouted)
RGB_EVEN_G0  (2 unrouted)
RGB_EVEN_G1  (2 unrouted)
RGB_EVEN_G2  (2 unrouted)
RGB_EVEN_G3  (2 unrouted)
RGB_EVEN_G4  (2 unrouted)
RGB_EVEN_G5  (2 unrouted)
RGB_EVEN_G6  (2 unrouted)
RGB_EVEN_G7  (2 unrouted)
RGB_EVEN_R0  (2 unrouted)
RGB_EVEN_R1  (2 unrouted)
RGB_EVEN_R2  (2 unrouted)
RGB_EVEN_R3  (2 unrouted)
RGB_EVEN_R4  (2 unrouted)
RGB_EVEN_R5  (2 unrouted)
RGB_EVEN_R6  (2 unrouted)
RGB_EVEN_R7  (2 unrouted)
RGB_HSYNC  (2 unrouted)
RGB_ODCK  (2 unrouted)
RGB_PWM
  Top 0.15: JP4.3 JP6.1
RGB_PWM_EN  (1 unrouted)
RGB_VSYNC  (2 unrouted)
USB_D+
  Top 0.15: CON4.3 7.44,6.99 7.44,4.75 6.44,3.75 R23.1
USB_D-
  Top 0.15: CON4.2 6.62,6.97 6.62,5.56 5.94,4.88 R22.1